# EAGLE board Placa principal v89 (EAGLE 9.7.0)
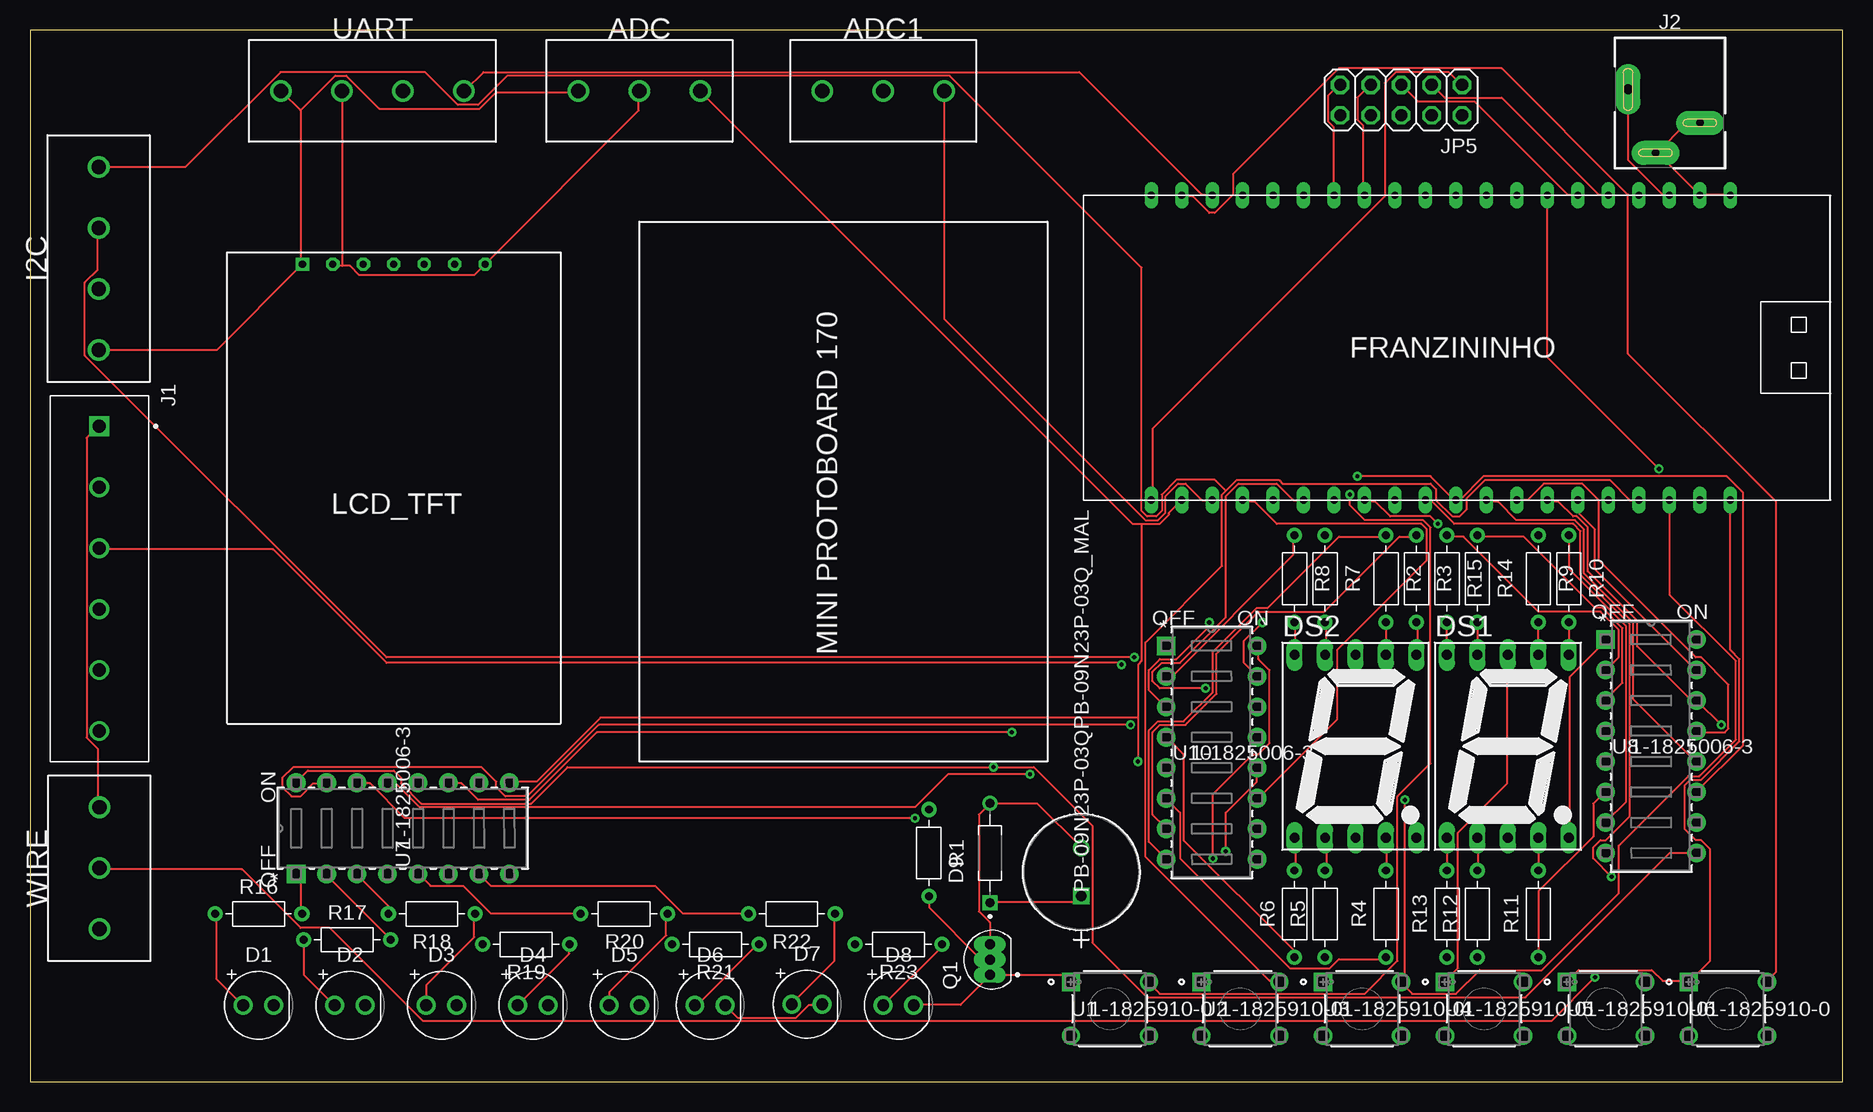
[diagram p0: board, top side]
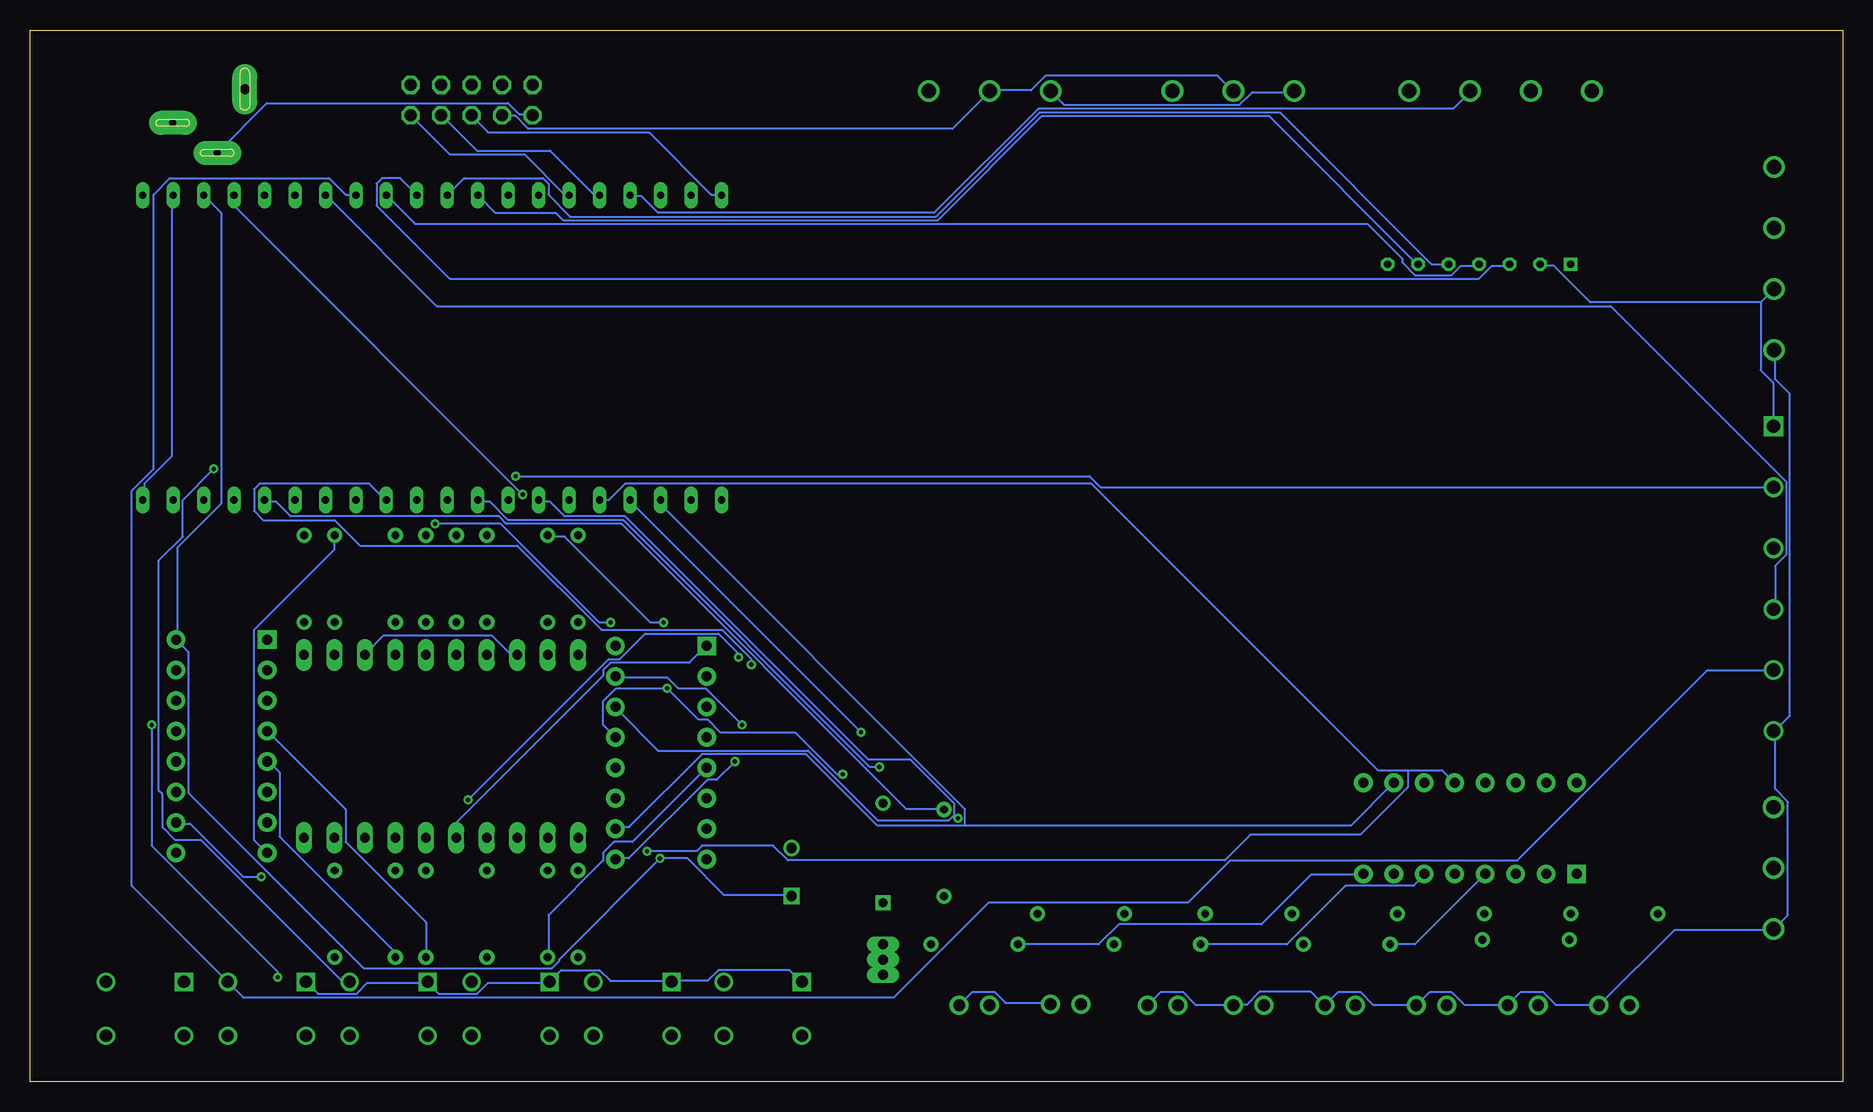
[diagram p1: board, bottom side, seen from below]

Size 151.11 x 87.63 mm. Coordinates in mm from the lower left corner, seen from the top.
Outline: 0,0 151.11,0 151.11,87.63 0,87.63 0,0
Copper layers (1*16): Top / Bottom
Stack-up Default Layer Stack: Top User Defined 0.035mm / Dielectric-1 User Defined 1.5mm / Bottom User Defined 0.035mm
Design rules "default": minimum track width 6mil, minimum drill 0.35mm, track to track 6mil, track to pad 6mil, pad to pad 6mil, via to via 6mil, smd to smd 6mil, copper to edge 40mil, drill to drill 6mil, minimum pad ring 10mil, minimum via ring 8mil, stop-mask expansion 4mil, vias tented up to drill 0mil, thermal gap 10mil

## Footprints (pad centres in the part's own frame; a part is rotated, then mirrored left to right if it is on the bottom)
TERMBLK_508-3N = drill 1.2: 1 0,0; 2 5.08,0; 3 10.16,0
LEDRD254W60D565H860B_B = drill 0.981 pad 1.581: 1 -1.27,0; 2 1.27,0
DIOAD829W49L456D191 = drill 0.73: A 4.146,0 | drill 0.73 square: C -4.146,0
7SEG-13 = drill 0.813 long: 1 -5.08,-7.62; 2 -2.54,-7.62; 3 0,-7.62; 4 2.54,-7.62; 5 5.08,-7.62; 6 5.08,7.62; 7 2.54,7.62; 8 0,7.62; 9 -2.54,7.62; 10 -5.08,7.62
TERMBLK_508-4N = drill 1.2: 1 0,0; 2 5.08,0; 3 10.16,0; 4 15.24,0
TE_282837-6 = drill 1.1 square: 1 -12.7,0 | drill 1.1: 2 -7.62,0; 3 -2.54,0; 4 2.54,0; 5 7.62,0; 6 12.7,0
694106402002 = drill 0.8 pad 2.1 long: 1 -3.5,0 | drill 0.6 pad 2 long: 2 -1.2,-5.3; 3 2.5,-2.8
2X05 = drill 1.016 octagon: 1 -5.08,-1.27; 2 -5.08,1.27; 3 -2.54,-1.27; 4 -2.54,1.27; 5 0,-1.27; 6 0,1.27; 7 2.54,-1.27; 8 2.54,1.27; 9 5.08,-1.27; 10 5.08,1.27
TFT = drill 0.6 octagon: BLK 7.46,17.31; DC 4.92,17.31; RES 2.38,17.31; SCL -2.7,17.31; SDA -0.16,17.31; VCC -5.24,17.31 | drill 0.6 square: GND -7.78,17.31
PB-09N23P-03Q_MAL = drill 0.864 pad 1.372 square: 1 0,0 | drill 0.864 pad 1.372: 2 4,0
TO92127P495H495-3 = drill 0.84 pad 1.04 long: 1 -1.27,0; 2 0,0; 3 1.27,0
RESAD724W46L381D178B = drill 0.66 pad 1.26: 1 -3.62,0; 2 3.62,0
SWITCH_1-1825910-0 = drill 1.016 pad 1.524 square: 1 -6.502,4.496 | drill 1.016 pad 1.524: 2 -6.502,0; 3 0,0; 4 0,4.496
SWDIP16_299X110P100 = drill 0.838 pad 1.549 square: 1 -7.595,17.78 | drill 0.838 pad 1.549: 2 -7.595,15.24; 3 -7.595,12.7; 4 -7.595,10.16; 5 -7.595,7.62; 6 -7.595,5.08; 7 -7.595,2.54; 8 -7.595,0; 9 0,0; 10 0,2.54; 11 0,5.08; 12 0,7.62; 13 0,10.16; 14 0,12.7; 15 0,15.24; 16 0,17.78
FRANZININHO = drill 0.6 long: 0 0,6.35; 1 0,3.81; 2 0,1.27; 3 0,-1.27; 3V3 0,-39.37; 4 0,-3.81; 5 0,-6.35; 5V 25.4,-36.83; 6 0,-8.89; 7 0,-11.43; 8 0,-34.29; 9 0,-36.83; 10 0,-13.97; 11 0,-16.51; 12 0,-19.05; 13 0,-21.59; 14 0,-24.13; 15 0,-26.67; 16 0,-29.21; 17 0,-31.75; 18 25.4,-34.29; 21 25.4,-31.75; 26 25.4,-29.21; 33 25.4,-26.67; 34 25.4,-24.13; 35 25.4,-21.59; 36 25.4,-19.05; 37 25.4,-16.51; 38 25.4,-13.97; 39 25.4,-11.43; 40 25.4,-8.89; 41 25.4,-6.35; 42 25.4,-3.81; 43 25.4,-1.27; 44 25.4,1.27; 45 25.4,3.81; 46 25.4,6.35; GND1 0,-41.91; GND2 25.4,-39.37; GND3 25.4,-41.91

## Placement (x,y rotation side)
ADC  2828XX-3282837-3  [TERMBLK_508-3N]  55.88,82.55 180 top
ADC1  2828XX-3282837-3  [TERMBLK_508-3N]  76.2,82.55 180 top
D1  LED_BLUE  [LEDRD254W60D565H860B_B]  19.05,6.35 0 top
D2  LED_BLUE  [LEDRD254W60D565H860B_B]  26.67,6.35 0 top
D3  LED_BLUE  [LEDRD254W60D565H860B_B]  34.29,6.35 0 top
D4  LED_BLUE  [LEDRD254W60D565H860B_B]  41.91,6.35 0 top
D5  LED_BLUE  [LEDRD254W60D565H860B_B]  49.53,6.35 0 top
D6  LED_BLUE  [LEDRD254W60D565H860B_B]  56.69,6.35 0 top
D7  LED_BLUE  [LEDRD254W60D565H860B_B]  64.77,6.44 0 top
D8  LED_BLUE  [LEDRD254W60D565H860B_B]  72.39,6.35 0 top
D9  1N4148  [DIOAD829W49L456D191]  80.01,19.05 90 top
DS1  7SEG-CA  [7SEG-13]  123.19,27.94 0 top
DS2  7SEG-CA  [7SEG-13]  110.49,27.94 0 top
I2C  2828XX-4282837-4  [TERMBLK_508-4N]  5.73,76.2 270 top
J1  282837-6  [TE_282837-6]  5.78,41.91 270 top
J2  [694106402002]  136.7,82.69 0 top
JP5  PINHD-2X5  [2X05]  114.3,81.79 180 top
LCD_TFT  DISPLAY240X240IPSTFT  [TFT]  30.48,50.8 0 top
LS1  PB-09N23P-03QPB-09N23P-03Q_MAL  [PB-09N23P-03Q_MAL]  87.63,15.46 90 top
Q1  2N3904  [TO92127P495H495-3]  80.01,10.16 90 top
R1  1K  [RESAD724W46L381D178B]  74.93,19.05 270 top
R2  [RESAD724W46L381D178B]  113.03,41.91 270 top
R3  [RESAD724W46L381D178B]  115.57,41.91 270 top
R4  [RESAD724W46L381D178B]  113.03,13.97 90 top
R5  [RESAD724W46L381D178B]  107.95,13.97 90 top
R6  [RESAD724W46L381D178B]  105.41,13.97 90 top
R7  [RESAD724W46L381D178B]  107.95,41.91 270 top
R8  [RESAD724W46L381D178B]  105.41,41.91 270 top
R9  [RESAD724W46L381D178B]  125.73,41.91 270 top
R10  [RESAD724W46L381D178B]  128.27,41.91 270 top
R11  [RESAD724W46L381D178B]  125.73,13.97 90 top
R12  [RESAD724W46L381D178B]  120.65,13.97 90 top
R13  [RESAD724W46L381D178B]  118.11,13.97 90 top
R14  [RESAD724W46L381D178B]  120.65,41.91 270 top
R15  [RESAD724W46L381D178B]  118.11,41.91 270 top
R16  [RESAD724W46L381D178B]  19.05,13.97 0 top
R17  [RESAD724W46L381D178B]  26.43,11.82 0 top
R18  [RESAD724W46L381D178B]  33.5,13.97 180 top
R19  [RESAD724W46L381D178B]  41.35,11.43 180 top
R20  [RESAD724W46L381D178B]  49.53,13.97 180 top
R21  [RESAD724W46L381D178B]  57.15,11.43 180 top
R22  [RESAD724W46L381D178B]  63.5,13.97 180 top
R23  [RESAD724W46L381D178B]  72.39,11.43 180 top
U1  1-1825910-0  [SWITCH_1-1825910-0]  93.27,3.81 0 top
U2  1-1825910-0  [SWITCH_1-1825910-0]  104.14,3.81 0 top
U3  1-1825910-0  [SWITCH_1-1825910-0]  114.3,3.81 0 top
U4  1-1825910-0  [SWITCH_1-1825910-0]  124.46,3.81 0 top
U5  1-1825910-0  [SWITCH_1-1825910-0]  134.62,3.81 0 top
U6  1-1825910-0  [SWITCH_1-1825910-0]  144.78,3.81 0 top
U7  1-1825006-3  [SWDIP16_299X110P100]  39.97,24.9 90 top
U8  1-1825006-3  [SWDIP16_299X110P100]  138.93,19.05 0 top
U10  1-1825006-3  [SWDIP16_299X110P100]  102.3,18.53 0 top
U$1  FRANZININHO  [FRANZININHO]  99.81,48.46 90 top
U$3  MINIPROTOBOARD  [MINIPROTOBOARD]  50.8,26.67 90 top
UART  2828XX-4282837-4  [TERMBLK_508-4N]  36.16,82.55 180 top
WIRE  2828XX-3282837-3  [TERMBLK_508-3N]  5.78,22.86 270 top

## Library data of the parts
ADC ADC1 WIRE = Connector; CATEGORY: Connector; DESCRIPTION: TERM BLK 3P SIDE ENT 5.08mm PCB; MANUFACTURER: TE Connectivity; MPN: 282837-3; OPERATING_TEMPERATURE: -40°C to +105°C; PART_STATUS: Active; ROHS_COMPLIANCE: RoHS Compliant; SERIES: 282837; SUBCATEGORY: Terminal Block; TYPE: Side Wire Entry
D1-D8 = Opto-Electronic; CATEGORY: Opto-Electronic; SUB-CATEGORY: LED
D9 = 1N4148; AVAILABILITY: Unavailable; DESCRIPTION: Diode Small Signal Switching 100V 0.3A 2-Pin DO-35; MF: MICROSS/On Semiconductor; MP: 1N4148; PACKAGE: DO-35 Vishay; PRICE: None; STANDARD: IPC-7251
DS1 DS2 = Opto-Electronic; CATEGORY: Opto-Electronic; SUB-CATEGORY: Display; TYPE: 7-Segment
I2C UART = Connector; CATEGORY: Connector; DESCRIPTION: TERM BLK 4P SIDE ENT 5.08mm PCB; MANUFACTURER: TE Connectivity; MPN: 282837-4; OPERATING_TEMPERATURE: 40°C to +105°C; PART_STATUS: Active; ROHS_COMPLIANCE: RoHS Compliant; SERIES: 283737; SUBCATEGORY: Terminal Block; TYPE: Side Wire Entry
J1 = 282837-6; COMMENT: 282837-6; EU_ROHS_COMPLIANCE: Compliant with Exemptions
J2 = Connector; CATEGORY: Connector; DESCRIPTION: DC POWER JACK - VERTICAL - THT - 2.0 & 2.5Ø - WR-DC; MANUFACTURER: Würth Elektronik; MPN: 694106402002; OPERATING_TEMPERATURE: -40°C to +85°C; PART_STATUS: Active; ROHS_COMPLIANCE: RoHS Compliant; SERIES: WR-DC; SUBCATEGORY: Power Connector; TYPE: Vertical
JP5 = Connector; CATEGORY: CONNECTOR; SUB-CATEGORY: PIN-HEADER
LCD_TFT = displayLCD
LS1 = PB-09N23P-03Q_Library; COPYRIGHT: Copyright (C) 2022 Ultra Librarian. All rights reserved.; MANUFACTURER_PART_NUMBER: PB-09N23P-03Q; MFR_NAME: Mallory Sonalert
Q1 = 2N3904; MANUFACTURER: STMicroelectronics; MAXIMUM_PACKAGE_HEIGHT: 4.95 mm; PARTREV: February 2003; STANDARD: IPC 7351B
R1-R23 = Resistor; CATEGORY: Resistor; SUB-CATEGORY: Fixed
U1-U6 = Switches; BUILT_BY: EMA_UL_Team; CATEGORY: Tactile Switches; COPYRIGHT: Copyright (C) 2016 Accelerated Designs. All rights reserved; DESCRIPTION: FSM6JH=6MM TACT SWITCH, HIGH TEMP; MANUFACTURER_PART_NUMBER: 1-1825910-0; PART_STATUS: active; SERIES: Unknown; VENDOR: TE Connectivity
U7 U8 U10 = Switches; BUILT_BY: EMA_UL_Team; CATEGORY: DIP & SIP Switches; COPYRIGHT: Copyright (C) 2016 Accelerated Designs. All rights reserved; DESCRIPTION: GDS0804=DIP SW,SLIDE,THRU/HL; MANUFACTURER_PART_NUMBER: 1-1825006-3; PART_STATUS: active; SERIES: Alcoswitch DIP,Alcoswitch DIP GDS; VENDOR: TE Connectivity
U$1 = Franzininho_Library
U$3 = MINIPROTOBOARD

## Nets
3V3: U$1.3V3
+5V: D9.C J2.1 LS1.1 U8.16 U10.16 U$1.5V
GND: ADC1.3 ADC.3 D1.2 D2.2 D3.2 D4.2 D5.2 D6.2 D7.2 D8.2 DS1.8 DS2.8 I2C.4 J1.6 J2.2 J2.3 JP5.10 LCD_TFT.GND Q1.1 U1.1 U2.1 U3.1 U4.1 U5.1 U6.1 U$1.GND1 U$1.GND2 U$1.GND3 UART.4 WIRE.3
GPIO0: JP5.1 U$1.0
GPIO1: ADC.1 U7.9 U10.9 U$1.1
GPIO2: ADC1.1 U7.10 U10.10 U$1.2
GPIO3: U7.11 U10.11 U$1.3
GPIO4: U7.12 U10.12 U$1.4
GPIO5: U7.13 U10.13 U$1.5
GPIO6: U7.14 U10.14 U$1.6
GPIO7: U7.15 U10.15 U$1.7
GPIO8: I2C.1 U2.4 U$1.8
GPIO9: I2C.2 U3.4 U$1.9
GPIO10: U7.16 U8.9 U$1.10
GPIO11: U8.10 U$1.11
GPIO12: J1.2 U8.11 U$1.12
GPIO13: J1.3 U8.12 U$1.13
GPIO14: U8.13 U$1.14
GPIO15: U8.14 U$1.15 WIRE.2
GPIO16: U8.15 U$1.16
GPIO17: R1.1 U$1.17
GPIO18: U1.4 U$1.18
GPIO21: JP5.3 U$1.21
GPIO26: JP5.5 U$1.26
GPIO33: J1.4 U4.4 U$1.33
GPIO34: J1.5 U5.4 U$1.34
GPIO35: LCD_TFT.SDA U$1.35
GPIO36: LCD_TFT.SCL U$1.36
GPIO37: LCD_TFT.RES U$1.37
GPIO38: LCD_TFT.DC U$1.38
GPIO39: JP5.7 U$1.39
GPIO40: JP5.9 U$1.40
GPIO41: JP5.2 U$1.41
GPIO42: JP5.4 U$1.42
GPIO43: U$1.43 UART.2
GPIO44: U$1.44 UART.1
GPIO45: U6.4 U$1.45
GPIO46: JP5.6 U$1.46
N$1: D9.A LS1.2 Q1.3
N$2: DS2.1 R6.2
N$3: Q1.2 R1.2
N$4: R2.1 U10.8
N$5: R3.1 U10.7
N$6: R4.1 U10.6
N$7: R5.1 U10.5
N$8: R6.1 U10.4
N$9: R7.1 U10.3
N$10: R9.1 U8.8
N$11: R10.1 U8.7
N$12: R11.1 U8.6
N$13: R12.1 U8.5
N$14: R13.1 U8.4
N$15: R14.1 U8.3
N$16: R15.1 U8.2
N$17: R16.2 U7.1
N$18: R17.2 U7.2
N$19: R18.2 U7.3
N$20: R19.2 U7.4
N$21: DS1.7 R9.2
N$22: R20.2 U7.5
N$23: DS1.6 R10.2
N$24: DS1.4 R11.2
N$25: DS1.2 R12.2
N$26: DS1.1 R13.2
N$27: DS1.9 R14.2
N$28: DS1.10 R15.2
N$29: DS1.5 U8.1
N$30: DS2.7 R2.2
N$31: DS2.6 R3.2
N$32: DS2.4 R4.2
N$33: DS2.2 R5.2
N$34: R8.1 U10.2
N$35: DS2.9 R7.2
N$36: DS2.10 R8.2
N$37: DS2.5 U10.1
N$38: D1.1 R16.1
N$39: D2.1 R17.1
N$40: D3.1 R18.1
N$41: D4.1 R19.1
N$42: D5.1 R20.1
N$43: D6.1 R21.1
N$44: D7.1 R22.1
N$45: D8.1 R23.1
N$46: R21.2 U7.6
N$47: R22.2 U7.7
N$48: R23.2 U7.8
VCC: ADC1.2 ADC.2 I2C.3 J1.1 JP5.8 LCD_TFT.BLK LCD_TFT.VCC UART.3 WIRE.1

## Tracks (layer width: path | path; a pad name or v marks a point on that pad's centre or on a via)
+5V  (via drill 0.35)
  Top 0.152: D9.C 80.01,14.94 87.17,14.94 87.63,15.39 LS1.1 | v98.6,18.59 98.6,23.93 101.96,27.28 102.41,27.28 103.33,28.19 103.33,34.29 102.41,35.2 102.41,36.27 U10.16 | U$1.5V 136.55,73.91 136.09,73.91 133.2,76.81 133.2,82.6 J2.1
  Bottom 0.152: LS1.1 87.63,15.54 93.27,15.54 96.32,18.59 v98.6,18.59 106.98,10.21 106.98,10.06 107.59,9.45 123.29,9.45 137.92,24.08 137.92,35.81 138.84,36.73 U8.16 138.84,36.88 138.84,44.5 135.18,48.16 135.18,72.39 136.55,73.76 U$1.5V
GND
  Top 0.152: U$1.GND3 141.58,73.91 139.29,73.91 U$1.GND2 139.14,73.91 135.64,77.42 | 135.64,77.42 138.07,79.86 139.14,79.86 J2.3 | 135.64,77.42 J2.2 | U5.1 128.17,8.38 129.08,9.3 135.18,9.3 136.09,8.38 138.23,8.38 U6.1 138.38,8.38 140.06,10.06 140.06,19.36 139.29,20.12 138.84,20.12 137.92,21.03 137.92,24.69 138.38,25.15 139.29,25.15 142.49,28.35 142.49,35.2 141.73,35.97 141.73,48.31 U$1.GND1 | DS1.8 123.14,35.51 123.14,24.84 119.02,20.73 119.02,9.45 117.96,8.38 U4.1 | 22.55,80.92 22.55,68.12 LCD_TFT.GND 22.55,67.97 15.54,60.96 I2C.4 | 22.55,80.92 21.03,82.45 UART.4 | 22.55,80.92 25.45,83.82 26.36,83.82 29.11,81.08 37.49,81.08 38.86,82.45 45.72,82.45 ADC.3 | 80.01,8.84 86.26,8.84 86.72,8.38 U1.1 | 80.01,8.84 77.57,6.4 73.76,6.4 D8.2 | 80.01,8.84 Q1.1 | D7.2 65.99,6.4 64.92,6.4 63.86,5.33 58.98,5.33 58.06,6.25 D6.2
  Bottom 0.152: U$1.GND1 141.58,48.46 141.58,49.84 139.29,52.12 139.29,73.76 U$1.GND2 | JP5.10 109.27,80.62 110.34,80.62 111.25,81.53 131.37,81.53 135.48,77.42 J2.2 | DS2.8 110.49,35.66 111.1,35.66 112.62,37.19 121.61,37.19 123.14,35.66 DS1.8 | 117.96,8.23 122.99,8.23 123.9,7.32 127.1,7.32 128.02,8.23 U5.1 | 117.96,8.23 117.04,7.32 113.84,7.32 112.93,8.23 107.9,8.23 U3.1 107.75,8.38 106.83,9.3 103.63,9.3 102.72,8.38 97.69,8.38 U2.1 97.54,8.38 94.64,8.38 93.73,9.3 87.78,9.3 86.87,8.38 U1.1 | 117.96,8.23 U4.1 | ADC.3 45.72,82.45 49.23,82.45 50.29,81.38 64.92,81.38 65.99,82.45 ADC1.3 | D8.2 72.54,7.47 70.71,7.47 69.8,6.55 66.14,6.55 D7.2 | D6.2 57.91,6.4 56.84,7.47 55.02,7.47 53.95,6.4 50.9,6.4 D5.2 50.75,6.4 49.68,6.4 48.62,7.47 44.35,7.47 43.28,6.4 D4.2 42.06,7.47 40.23,7.47 39.17,6.4 35.66,6.4 D3.2 34.44,7.47 32.61,7.47 31.55,6.4 28.04,6.4 D2.2 26.82,7.47 24.99,7.47 23.93,6.4 20.42,6.4 D1.2 14.02,12.65 5.79,12.65 WIRE.3 5.64,12.8 4.57,13.87 4.57,23.32 5.64,24.38 5.64,29.11 J1.6 5.64,29.26 4.42,30.48 4.42,57.3 5.64,58.52 5.64,60.96 I2C.4
GPIO0
  Top 0.152: U$1.0 93.57,48.46 93.57,54.41 112.93,73.76 112.93,83.21 113.84,84.12 118.26,84.12 119.33,83.06 JP5.1
GPIO1  (via drill 0.35)
  Top 0.152: 92.66,46.48 91.9,46.48 55.93,82.45 ADC.1 | 92.66,46.48 94.18,46.48 94.94,47.24 94.94,47.4 95.86,48.31 U$1.1 | 92.35,30.33 92.35,34.75 92.66,35.05 92.66,46.48 | 92.35,30.33 v92.35,26.67 | 92.35,30.33 47.55,30.33 42.22,24.99 40.08,24.99 U7.9
  Bottom 0.152: v92.35,26.67 93.88,25.15 94.64,25.15 101.19,18.59 102.26,18.59 U10.9
GPIO2
  Top 0.152: ADC1.1 76.2,63.55 92.96,46.79 94.03,46.79 94.64,47.4 94.64,48.77 95.71,49.84 96.32,49.84 97.69,48.46 98.45,48.46 U$1.2
  Bottom 0.152: 73.15,21.34 41,21.34 37.49,24.84 U7.10 | 73.15,21.34 80.47,21.34 86.41,27.28 95.1,27.28 101.19,21.18 102.26,21.18 U10.10 | 73.15,21.34 73.15,22.71 98.45,48.01 98.45,48.31 U$1.2
GPIO3  (via drill 0.35)
  Top 0.152: U$1.3 101.19,48.31 102.11,48.31 103.94,46.48 115.98,46.48 116.43,46.02 116.43,43.43 108.97,35.97 108.97,30.18 102.41,23.62 U10.11 | v81.84,29.11 47.24,29.11 41.6,23.47 37.34,23.47 35.97,24.84 34.9,24.84 U7.11
  Bottom 0.152: v81.84,29.11 101.04,48.31 U$1.3
GPIO4  (via drill 0.35)
  Top 0.152: v99.67,19.2 99.67,22.4 102.26,24.99 102.26,26.06 U10.12
  Bottom 0.152: 36.27,25.91 33.38,25.91 32.46,24.99 U7.12 | 36.27,25.91 38.71,25.91 62.64,49.84 101.5,49.84 102.87,48.46 103.48,48.46 U$1.4 | v99.67,19.2 95.56,19.2 95.1,19.66 89.15,19.66 87.94,18.44 51.51,18.44 49.38,20.57 40.23,20.57 36.27,24.54 36.27,25.91
GPIO5  (via drill 0.35)
  Top 0.152: v97.99,32.77 94.18,32.77 93.57,33.38 93.57,34.14 94.34,34.9 95.86,34.9 99.67,38.71 99.67,48.77 100.74,49.84 103.94,49.84 105.31,48.46 106.07,48.46 U$1.5 | v83.36,25.6 76.5,25.6 73.76,22.86 32.46,22.86 30.48,24.84 29.87,24.84 U7.13
  Bottom 0.152: U10.13 102.41,28.8 103.33,29.72 103.33,31.7 102.26,32.77 v97.99,32.77 95.4,30.18 94.64,30.18 93.57,29.11 87.33,29.11 83.82,25.6 v83.36,25.6
GPIO6  (via drill 0.35)
  Top 0.152: v73.76,21.95 31.24,21.95 28.35,24.84 27.28,24.84 U7.14
  Bottom 0.152: 74.07,22.25 74.07,23.16 77.72,26.82 81.23,26.82 101.5,47.09 106.53,47.09 107.75,48.31 108.66,48.31 U$1.6 | 74.07,22.25 74.52,21.79 80.47,21.79 86.26,27.58 98.75,27.58 102.26,31.09 U10.14 | 74.07,22.25 v73.76,21.95
GPIO7  (via drill 0.35)
  Top 0.152: v117.35,46.48 116.74,47.09 113.39,47.09 112.17,48.31 111.25,48.31 U$1.7 | v102.72,38.25 101.19,36.73 101.19,34.9 102.26,33.83 U10.15 | v91.75,29.72 47.4,29.72 41.45,23.77 39.62,23.77 38.86,24.54 38.86,24.99 37.64,26.21 21.95,26.21 21.03,25.3 21.03,24.54 21.79,23.77 22.55,23.77 23.62,24.84 24.69,24.84 U7.15
  Bottom 0.152: v117.35,46.48 111.86,46.48 103.63,38.25 v102.72,38.25 | v91.75,29.72 94.79,32.77 97.08,32.77 97.99,33.68 102.26,33.68 U10.15
GPIO8
  Top 0.152: 99.67,49.23 99.36,48.92 99.36,42.98 92.96,36.58 92.96,18.75 103.33,8.38 104.09,8.38 U2.4 | 99.67,49.23 100.58,50.14 104.09,50.14 104.39,49.84 116.74,49.84 117.2,49.38 117.2,48.46 118.57,47.09 119.18,47.09 119.79,47.7 119.79,48.62 121.31,50.14 131.67,50.14 133.35,48.46 133.96,48.46 U$1.8 | I2C.1 12.95,76.2 20.88,84.12 32.92,84.12 35.66,81.38 37.34,81.38 39.78,83.82 76.66,83.82 92.66,67.82 92.66,47.55 93.12,47.09 93.88,47.09 94.34,47.55 94.34,48.92 95.56,50.14 98.75,50.14 99.67,49.23
GPIO9  (via drill 0.35)
  Top 0.152: U$1.9 136.7,48.31 136.7,40.54 142.19,35.05 142.19,28.5 139.14,25.45 138.23,25.45 132.44,19.66 132.44,15.7 126.03,9.3 120.85,9.3 118.87,7.32 115.21,7.32 114.3,8.23 U3.4 114.3,8.38 114.61,8.69 v114.61,23.47 | v92.05,35.36 29.72,35.36 4.57,60.5 4.57,66.6 5.64,67.67 5.64,71.02 I2C.2
  Bottom 0.152: v92.05,35.36 92.05,35.66 93.73,37.34 99.82,37.34 101.96,35.2 102.87,35.2 v114.61,23.47
GPIO10  (via drill 0.35)
  Top 0.152: U7.16 22.25,24.99 23.16,25.91 30.33,25.91 30.94,25.3 30.94,24.84 32.61,23.16 41.76,23.16 44.81,26.21 v80.31,26.21 83.67,26.21 88.54,21.34 88.54,11.58 93.12,7.01 124.66,7.01 136.7,19.05 U8.9
  Bottom 0.152: v80.31,26.21 81.08,26.21 101.65,46.79 111.25,46.79 112.78,48.31 113.69,48.31 U$1.10
GPIO11  (via drill 0.35)
  Top 0.152: v131.83,17.07 130.3,18.59 130.3,19.51 130.91,20.12 131.37,20.12 133.35,22.1 133.35,38.1 129.24,42.22 129.24,45.87 128.63,46.48 118.72,46.48 116.89,48.31 116.43,48.31 U$1.11
  Bottom 0.152: v131.83,17.07 133.35,17.07 137.77,21.49 138.84,21.49 U8.10
GPIO12  (via drill 0.35)
  Top 0.152: U8.11 138.99,24.23 142.8,28.04 142.8,49.07 141.43,50.44 121.16,50.44 119.18,48.46 118.87,48.46 U$1.12 118.72,48.46 116.74,50.44 v110.64,50.44
  Bottom 0.152: J1.2 61.87,49.53 62.79,50.44 v110.64,50.44
GPIO13  (via drill 0.35)
  Top 0.152: U$1.13 121.46,48.31 122.38,48.31 123.9,46.79 128.78,46.79 129.54,46.02 129.54,42.37 133.66,38.25 133.66,31.85 138.84,26.67 U8.12 | v90.98,34.75 90.83,34.9 29.72,34.9 20.27,44.35 5.79,44.35 J1.3
  Bottom 0.152: v90.98,34.75 90.98,35.2 93.42,37.64 103.48,37.64 110.49,44.65 123.6,44.65 125.73,46.79 131.67,46.79 132.44,47.55 132.44,49.38 131.98,49.84 122.83,49.84 121.46,48.46 U$1.13
GPIO14
  Top 0.152: U$1.14 124.05,48.46 124.82,48.46 126.19,49.84 129.39,49.84 130.76,48.46 130.76,43.43 138.84,35.36 139.29,35.36 141.58,33.07 141.58,29.41 141.28,29.11 138.99,29.11 U8.13
GPIO15  (via drill 0.35)
  Top 0.152: U$1.15 126.49,48.31 127.41,48.31 128.63,47.09 128.93,47.09 129.84,46.18 129.84,42.52 133.96,38.41 133.96,36.27 138.38,31.85 138.84,31.85 U8.14 138.99,31.7 v140.97,29.72 | v130.45,8.69 126.8,5.03 32.77,5.03 24.99,12.8 22.55,12.8 17.68,17.68 5.79,17.68 WIRE.2
  Bottom 0.152: v130.45,8.69 130.45,9.14 140.97,19.66 v140.97,29.72
GPIO16
  Top 0.152: U$1.16 129.08,48.31 129.08,47.4 130.45,46.02 130.45,42.67 138.84,34.29 U8.15
GPIO17
  Bottom 0.152: U$1.17 131.52,48.31 130.61,48.31 129.39,47.09 112.01,47.09 111.4,46.48 101.8,46.48 78.03,22.71 74.98,22.71 R1.1
GPIO18  (via drill 0.35)
  Top 0.152: v110.03,48.92 110.03,48.01 111.25,46.79 116.13,46.79 116.74,46.18 116.74,26.52 114,23.77 114,10.06 111.25,7.32 94.18,7.32 93.27,8.23 U1.4
  Bottom 0.152: v110.03,48.92 133.96,72.85 133.96,73.76 U$1.18
GPIO21
  Top 0.152: U$1.21 131.52,73.91 130.76,73.91 122.68,81.99 117.96,81.99 116.89,83.06 JP5.3
GPIO26
  Top 0.152: JP5.5 115.67,81.69 120.4,81.69 128.17,73.91 128.93,73.91 U$1.26
GPIO33  (via drill 0.35)
  Top 0.152: v135.79,51.05 126.49,60.35 126.49,73.76 U$1.33
  Bottom 0.152: v135.79,51.05 138.38,48.46 138.38,45.41 140.36,43.43 140.36,24.23 140.06,23.93 140.06,21.18 138.99,20.12 136.85,20.12 125.12,8.38 124.51,8.38 U4.4 | J1.4 5.64,39.47 5.64,42.98 4.72,43.89 4.72,49.99 19.36,64.62 117.2,64.62 126.34,73.76 U$1.33
GPIO34
  Bottom 0.152: U$1.34 124.05,73.91 124.82,73.91 126.19,75.29 139.45,75.29 140.82,73.91 140.82,51.05 142.65,49.23 142.65,16.31 134.72,8.38 U5.4 134.57,8.23 133.35,7.01 79.1,7.01 71.17,14.94 54.56,14.94 51.05,18.44 27.13,18.44 11.28,34.29 J1.5
GPIO35
  Bottom 0.152: LCD_TFT.SDA 30.33,67.97 31.85,67.97 32.61,67.21 35.66,67.21 36.73,68.28 36.73,68.58 39.62,71.48 119.02,71.48 121.31,73.76 U$1.35
GPIO36
  Bottom 0.152: LCD_TFT.SCL 27.89,67.97 29.26,67.97 30.33,66.9 116.13,66.9 122.22,73 122.22,74.83 121.77,75.29 120.24,75.29 118.87,73.91 U$1.36
GPIO37
  Bottom 0.152: LCD_TFT.RES 32.92,68.12 34.29,68.12 46.94,80.77 66.9,80.77 75.59,72.08 106.07,72.08 107.9,73.91 107.9,74.83 108.36,75.29 114.91,75.29 116.28,73.91 U$1.37
GPIO38
  Bottom 0.152: LCD_TFT.DC 35.51,68.12 47.85,80.47 66.75,80.47 75.44,71.78 106.68,71.78 107.29,72.39 112.32,72.39 113.69,73.76 U$1.38
GPIO39
  Top 0.152: U$1.39 111.1,73.91 111.1,79.7 110.64,80.16 110.64,81.99 111.71,83.06 JP5.7
GPIO40
  Top 0.152: U$1.40 108.66,73.91 108.66,79.55 108.2,80.01 108.2,82.14 109.12,83.06 JP5.9
GPIO41
  Bottom 0.152: JP5.2 116.13,77.27 109.88,77.27 106.53,73.91 106.22,73.91 U$1.41
GPIO42
  Bottom 0.152: U$1.42 103.63,73.91 104.09,73.91 107.75,77.57 113.84,77.57 116.74,80.47 JP5.4
GPIO43
  Bottom 0.152: U$1.43 101.04,73.76 100.13,73.76 98.75,72.39 75.74,72.39 67.06,81.08 32.46,81.08 31.09,82.45 UART.2
GPIO44
  Top 0.152: U$1.44 98.45,73.91 97.69,73.91 87.48,84.12 37.8,84.12 36.27,82.6 UART.1
GPIO45
  Top 0.152: U$1.45 96.01,73.76 96.93,73.76 98.3,72.39 98.75,72.39 100.28,73.91 100.28,75.59 109.12,84.43 122.68,84.43 133.2,73.91 133.2,60.66 145.54,48.31 145.54,9.14 144.78,8.38 U6.4
GPIO46
  Bottom 0.152: U$1.46 93.57,73.91 94.34,73.91 99.52,79.1 112.93,79.1 114.3,80.47 JP5.6
N$1
  Top 0.152: 80.01,23.16 83.97,23.16 87.63,19.51 LS1.2 | Q1.3 80.01,13.26 79.1,14.17 79.1,22.25 80.01,23.16 | 80.01,23.16 D9.A
N$2
  Top 0.152: R6.2 105.46,17.68 105.46,20.27 DS2.1
N$3
  Top 0.152: R1.2 74.98,15.39 74.98,14.48 79.25,10.21 80.01,10.21 Q1.2
N$4
  Top 0.152: R2.1 112.93,45.41 109.12,45.41 103.17,39.47 102.26,39.47 98.6,35.81 98.6,32.46 96.16,30.02 94.03,30.02 93.27,29.26 93.27,19.96 94.64,18.59 U10.8
N$5
  Top 0.152: R3.1 115.52,45.41 114.15,45.41 107.9,39.17 102.41,39.17 98.91,35.66 98.91,32.31 96.32,29.72 94.18,29.72 93.57,29.11 93.57,22.25 94.64,21.18 U10.7
N$6
  Top 0.152: R4.1 112.93,10.21 109.12,10.21 108.36,9.45 105,9.45 95.86,18.59 95.86,22.4 94.79,23.47 U10.6
N$7
  Bottom 0.152: R5.1 107.9,10.36 107.9,13.87 103.33,18.44 103.33,19.05 102.41,19.96 100.89,19.96 94.79,26.06 U10.5
N$8
  Top 0.152: R6.1 105.31,10.36 105.31,10.97 96.16,20.12 96.16,27.28 94.79,28.65 U10.4
N$9  (via drill 0.35)
  Top 0.152: v98.3,38.25 98.3,37.95 95.56,35.2 94.18,35.2 93.27,34.29 93.27,32.61 94.64,31.24 U10.3
  Bottom 0.152: v98.3,38.25 99.36,38.25 106.53,45.41 107.9,45.41 R7.1
N$10
  Bottom 0.152: R9.1 125.73,44.35 132.44,37.64 132.44,20.12 131.37,19.05 U8.8
N$11
  Top 0.152: R10.1 128.32,45.41 128.32,42.67 133.04,37.95 133.04,23.32 131.37,21.64 U8.7
N$12
  Top 0.152: R11.1 125.73,15.85 130.3,20.42 130.3,23.16 131.22,24.08 U8.6
N$13
  Bottom 0.152: R12.1 120.7,10.36 120.7,10.82 130.3,20.42 130.3,25.76 131.22,26.67 U8.5
N$14
  Bottom 0.152: R13.1 118.11,13.26 124.82,19.96 124.82,22.71 131.22,29.11 U8.4
N$15
  Top 0.152: R14.1 120.7,45.41 124.51,45.41 130.45,39.47 131.06,39.47 132.74,37.8 132.74,33.22 131.37,31.85 U8.3
N$16
  Top 0.152: R15.1 118.11,45.41 119.48,45.41 125.73,39.17 130.91,39.17 132.44,37.64 132.44,35.36 131.37,34.29 U8.2
N$17
  Top 0.152: R16.2 22.55,14.02 22.55,16.92 22.25,17.22 U7.1
N$18
  Top 0.152: R17.2 30.02,11.89 24.69,17.22 U7.2
N$19
  Top 0.152: R18.2 29.87,14.02 29.87,14.63 27.28,17.22 U7.3
N$20
  Bottom 0.152: R19.2 35.66,11.43 29.87,17.22 U7.4
N$21
  Top 0.152: DS1.7 R9.2
N$22
  Top 0.152: R20.2 45.87,14.02 38.41,14.02 36.12,16.31 33.38,16.31 32.46,17.22 U7.5
N$23
  Top 0.152: R10.2 128.32,38.25 128.32,35.66 DS1.6
N$24
  Top 0.152: DS1.4 R11.2
N$25
  Top 0.152: R12.2 120.7,17.68 120.7,20.27 DS1.2
N$26
  Top 0.152: DS1.1 R13.2
N$27
  Top 0.152: R14.2 120.7,38.25 120.7,35.66 DS1.9
N$28
  Top 0.152: DS1.10 R15.2
N$29
  Top 0.152: DS1.5 128.32,20.42 128.32,33.68 131.37,36.73 U8.1
N$30
  Top 0.152: R2.2 113.08,38.25 113.08,35.66 DS2.7
N$31
  Top 0.152: R3.2 115.67,38.25 115.67,35.66 DS2.6
N$32
  Top 0.152: R4.2 113.08,17.68 113.08,20.27 DS2.4
N$33
  Top 0.152: R5.2 108.05,17.68 108.05,20.27 DS2.2
N$34
  Top 0.152: R8.1 105.31,45.41 105.31,43.89 95.25,33.83 94.79,33.83 U10.2
N$35
  Top 0.152: R7.2 108.05,38.25 108.05,35.66 DS2.9
N$36
  Top 0.152: R8.2 105.46,38.25 105.46,35.66 DS2.10
N$37
  Bottom 0.152: DS2.5 115.52,20.42 115.52,21.64 103.33,33.83 103.33,34.29 102.72,34.9 96.16,34.9 94.79,36.27 U10.1
N$38
  Top 0.152: R16.1 15.54,13.87 15.54,8.53 17.68,6.4 D1.1
N$39
  Top 0.152: R17.1 22.86,11.73 22.86,8.84 25.3,6.4 D2.1
N$40
  Top 0.152: R18.1 37.03,13.87 37.03,12.04 33.07,8.08 33.07,6.4 D3.1
N$41
  Top 0.152: D4.1 44.96,10.67 44.96,11.43 R19.1
N$42
  Top 0.152: R20.1 53.03,13.87 53.03,12.19 48.31,7.47 48.31,6.4 D5.1
N$43
  Top 0.152: R21.1 60.66,11.43 55.47,6.25 D6.1
N$44
  Top 0.152: R22.1 67.06,13.87 67.06,10.06 63.55,6.55 D7.1
N$45
  Top 0.152: D8.1 75.89,11.12 75.89,11.43 R23.1
N$46
  Bottom 0.152: R21.2 46.33,11.43 41.45,16.31 35.81,16.31 34.9,17.22 U7.6
N$47
  Top 0.152: R22.2 59.74,14.02 54.41,14.02 52.12,16.31 38.41,16.31 37.49,17.22 U7.7
N$48
  Bottom 0.152: R23.2 62.03,11.43 60.35,13.11 48.46,13.11 44.35,17.22 40.08,17.22 U7.8
VCC
  Top 0.152: 26.06,67.97 26.67,67.97 27.43,67.21 37.03,67.21 37.8,67.97 LCD_TFT.BLK 37.95,68.12 50.75,80.92 50.75,82.45 ADC.2 | 26.06,67.97 25.3,67.97 LCD_TFT.VCC | 26.06,67.97 26.06,82.45 UART.3 | WIRE.1 5.64,22.86 5.64,27.74 4.72,28.65 4.72,53.65 5.64,54.56 J1.1
  Bottom 0.152: JP5.8 111.71,80.47 110.64,80.47 109.58,79.4 74.22,79.4 71.17,82.45 ADC1.2 71.02,82.6 67.67,82.6 66.45,83.82 52.12,83.82 50.9,82.6 ADC.2 | 6.86,64.92 6.86,59.28 5.79,58.22 5.79,54.71 J1.1 | 6.86,64.92 5.79,65.99 I2C.3 | 6.86,64.92 21.03,64.92 24.08,67.97 25.15,67.97 LCD_TFT.VCC